# EAGLE board magarray-halleffect-Panel (EAGLE 7.7.0), part 1 of 3
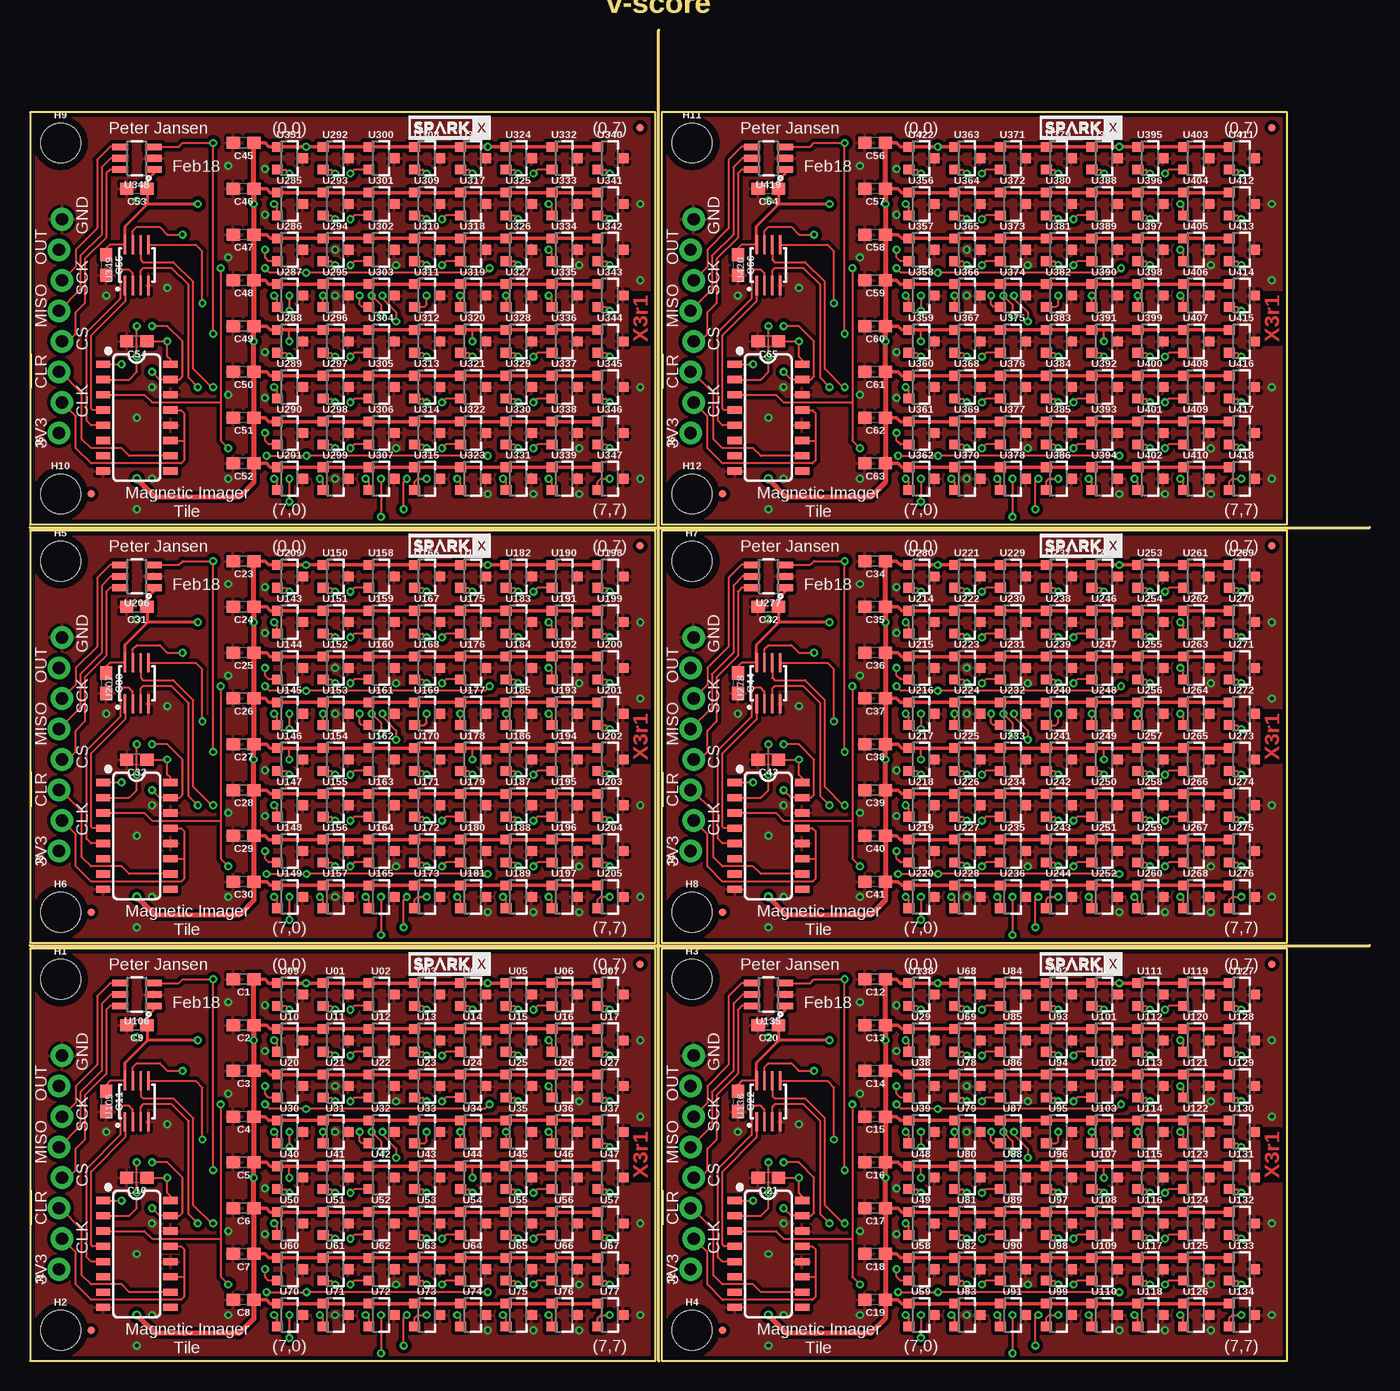
[diagram p0: board, top side]
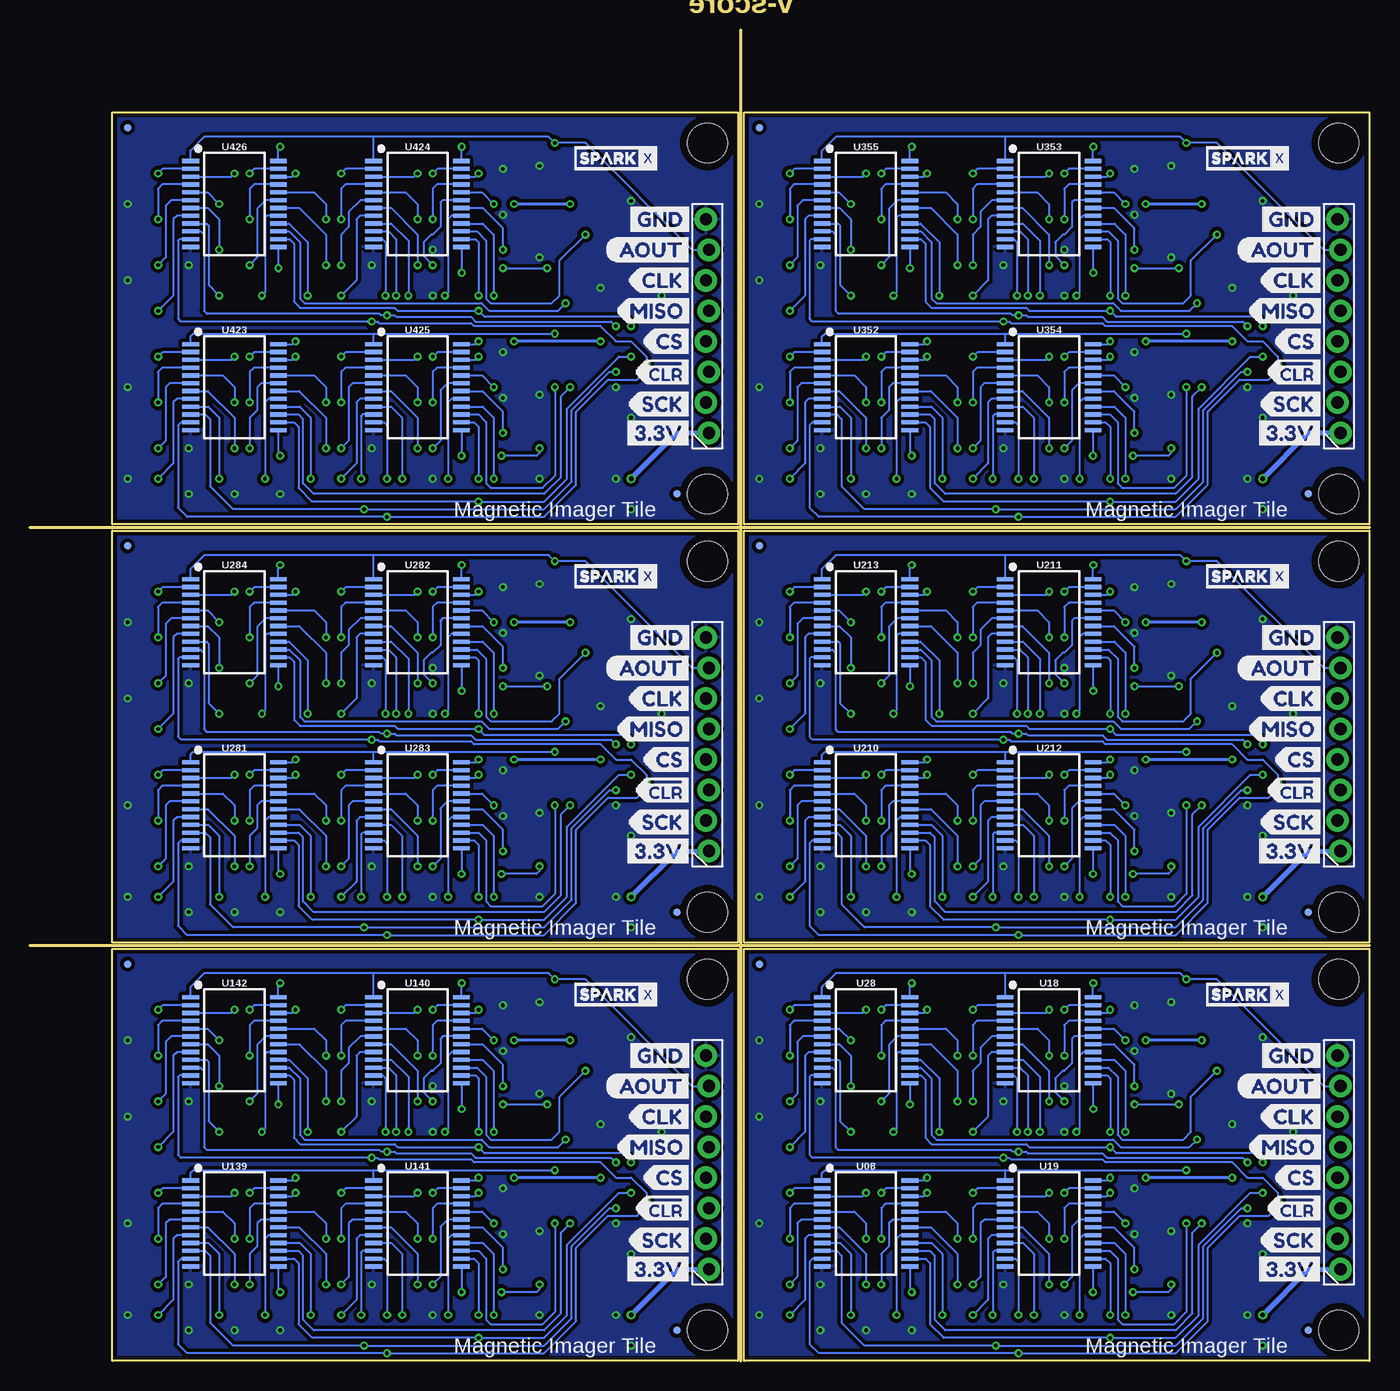
[diagram p1: board, bottom side, seen from below]

Size 111.51 x 110.74 mm. Coordinates in mm from the lower left corner, seen from the top.
Outline: 52.32,0 52.32,110.74
Outline: 0,34.54 111.51,34.54
Outline: 0,69.34 111.51,69.34
Outline: 0,0 52.07,0 52.07,34.29 0,34.29 0,0
Outline: 52.58,0 104.65,0 104.65,34.29 52.58,34.29 52.58,0
Outline: 0,34.8 52.07,34.8 52.07,69.09 0,69.09 0,34.8
Outline: 52.58,34.8 104.65,34.8 104.65,69.09 52.58,69.09 52.58,34.8
Outline: 0,69.6 52.07,69.6 52.07,103.89 0,103.89 0,69.6
Outline: 52.58,69.6 104.65,69.6 104.65,103.89 52.58,103.89 52.58,69.6
Copper layers (1*16): Top 0.035mm / dielectric 1.5mm / Bottom 0.035mm
Design rules "SparkFun-2-layer-PCBWay-LIMIT": minimum track width 6mil, minimum drill 0.3mm, track to track 6mil, track to pad 6mil, pad to pad 6mil, via to via 6mil, smd to smd 6mil, copper to edge 6mil, drill to drill 6mil, minimum pad ring 7mil, minimum via ring 7mil, stop-mask expansion 4mil, vias tented up to drill 25mil, thermal gap 10mil

## Footprints (pad centres in the part's own frame; a part is rotated, then mirrored left to right if it is on the bottom)
0603 = smd 1.1 x 1: 1 -0.85,0; 2 0.85,0
FIDUCIAL-MICRO = smd 0.635 x 0.635: 1 0,0
STAND-OFF = hole 3.302: 0,0
1X08_LOCK_NO_SILK = drill 1.016 pad 1.88: 1 0,0.127; 2 2.54,-0.127; 3 5.08,0.127; 4 7.62,-0.127; 5 10.16,0.127; 6 12.7,-0.127; 7 15.24,0.127; 8 17.78,-0.127
SOT23-3 = smd 0.8 x 0.9: 1 -0.95,-1; 2 0.95,-1; 3 0,1.1
SSOP24 = smd 0.348 x 1.397: 1 -3.575,-3.656; 2 -2.925,-3.656; 3 -2.275,-3.656; 4 -1.625,-3.656; 5 -0.975,-3.656; 6 -0.325,-3.656; 7 0.325,-3.656; 8 0.975,-3.656; 9 1.625,-3.656; 10 2.275,-3.656; 11 2.925,-3.656; 12 3.575,-3.656; 13 3.575,3.656; 14 2.925,3.656; 15 2.275,3.656; 16 1.625,3.656; 17 0.975,3.656; 18 0.325,3.656; 19 -0.325,3.656; 20 -0.975,3.656; 21 -1.625,3.656; 22 -2.275,3.656; 23 -2.925,3.656; 24 -3.575,3.656
SO16 = smd 0.6 x 1.2: 1 -4.445,-2.8; 2 -3.175,-2.8; 3 -1.905,-2.8; 4 -0.635,-2.8; 5 0.635,-2.8; 6 1.905,-2.8; 7 3.175,-2.8; 8 4.445,-2.8; 9 4.445,2.8; 10 3.175,2.8; 11 1.905,2.8; 12 0.635,2.8; 13 -0.635,2.8; 14 -1.905,2.8; 15 -3.175,2.8; 16 -4.445,2.8
SM8 = smd 1.55 x 0.25: 1 -1.7,0.975; 2 -1.7,0.325; 3 -1.7,-0.325; 4 -1.7,-0.975; 5 1.7,-0.975; 6 1.7,-0.325; 7 1.7,0.325; 8 1.7,0.975
SOT23-6 = smd 0.55 x 1.35: 1 -0.95,-1.375; 2 0,-1.375; 3 0.95,-1.375; 4 0.95,1.375; 5 0,1.375; 6 -0.95,1.375

## Placement (x,y rotation side)
C1  4.7uF  [0603]  17.78,31.75 180 top
C2  4.7uF  [0603]  17.78,27.94 180 top
C3  4.7uF  [0603]  17.78,24.13 180 top
C4  4.7uF  [0603]  17.78,20.32 180 top
C5  4.7uF  [0603]  17.78,16.51 180 top
C6  4.7uF  [0603]  17.78,12.7 180 top
C7  4.7uF  [0603]  17.78,8.89 180 top
C8  4.7uF  [0603]  17.78,5.08 180 top
C9  0.1uF  [0603]  8.89,27.94 180 top
C10  0.1uF  [0603]  8.89,15.24 180 top
C11  0.1uF  [0603]  6.35,21.59 270 top
C12  4.7uF  [0603]  70.36,31.75 180 top
C13  4.7uF  [0603]  70.36,27.94 180 top
C14  4.7uF  [0603]  70.36,24.13 180 top
C15  4.7uF  [0603]  70.36,20.32 180 top
C16  4.7uF  [0603]  70.36,16.51 180 top
C17  4.7uF  [0603]  70.36,12.7 180 top
C18  4.7uF  [0603]  70.36,8.89 180 top
C19  4.7uF  [0603]  70.36,5.08 180 top
C20  0.1uF  [0603]  61.47,27.94 180 top
C21  0.1uF  [0603]  61.47,15.24 180 top
C22  0.1uF  [0603]  58.93,21.59 270 top
C23  4.7uF  [0603]  17.78,66.55 180 top
C24  4.7uF  [0603]  17.78,62.74 180 top
C25  4.7uF  [0603]  17.78,58.93 180 top
C26  4.7uF  [0603]  17.78,55.12 180 top
C27  4.7uF  [0603]  17.78,51.31 180 top
C28  4.7uF  [0603]  17.78,47.5 180 top
C29  4.7uF  [0603]  17.78,43.69 180 top
C30  4.7uF  [0603]  17.78,39.88 180 top
C31  0.1uF  [0603]  8.89,62.74 180 top
C32  0.1uF  [0603]  8.89,50.04 180 top
C33  0.1uF  [0603]  6.35,56.39 270 top
C34  4.7uF  [0603]  70.36,66.55 180 top
C35  4.7uF  [0603]  70.36,62.74 180 top
C36  4.7uF  [0603]  70.36,58.93 180 top
C37  4.7uF  [0603]  70.36,55.12 180 top
C38  4.7uF  [0603]  70.36,51.31 180 top
C39  4.7uF  [0603]  70.36,47.5 180 top
C40  4.7uF  [0603]  70.36,43.69 180 top
C41  4.7uF  [0603]  70.36,39.88 180 top
C42  0.1uF  [0603]  61.47,62.74 180 top
C43  0.1uF  [0603]  61.47,50.04 180 top
C44  0.1uF  [0603]  58.93,56.39 270 top
C45  4.7uF  [0603]  17.78,101.35 180 top
C46  4.7uF  [0603]  17.78,97.54 180 top
C47  4.7uF  [0603]  17.78,93.73 180 top
C48  4.7uF  [0603]  17.78,89.92 180 top
C49  4.7uF  [0603]  17.78,86.11 180 top
C50  4.7uF  [0603]  17.78,82.3 180 top
C51  4.7uF  [0603]  17.78,78.49 180 top
C52  4.7uF  [0603]  17.78,74.68 180 top
C53  0.1uF  [0603]  8.89,97.54 180 top
C54  0.1uF  [0603]  8.89,84.84 180 top
C55  0.1uF  [0603]  6.35,91.19 270 top
C56  4.7uF  [0603]  70.36,101.35 180 top
C57  4.7uF  [0603]  70.36,97.54 180 top
C58  4.7uF  [0603]  70.36,93.73 180 top
C59  4.7uF  [0603]  70.36,89.92 180 top
C60  4.7uF  [0603]  70.36,86.11 180 top
C61  4.7uF  [0603]  70.36,82.3 180 top
C62  4.7uF  [0603]  70.36,78.49 180 top
C63  4.7uF  [0603]  70.36,74.68 180 top
C64  0.1uF  [0603]  61.47,97.54 180 top
C65  0.1uF  [0603]  61.47,84.84 180 top
C66  0.1uF  [0603]  58.93,91.19 270 top
FD1  FIDUCIALUFIDUCIAL  [FIDUCIAL-MICRO]  50.8,33.02 90 top
FD2  FIDUCIALUFIDUCIAL  [FIDUCIAL-MICRO]  5.08,2.54 90 top
FD3  FIDUCIALUFIDUCIAL  [FIDUCIAL-MICRO]  5.08,2.54 90 bottom
FD4  FIDUCIALUFIDUCIAL  [FIDUCIAL-MICRO]  50.8,33.02 90 bottom
FD5  FIDUCIALUFIDUCIAL  [FIDUCIAL-MICRO]  103.38,33.02 90 top
FD6  FIDUCIALUFIDUCIAL  [FIDUCIAL-MICRO]  57.66,2.54 90 top
FD7  FIDUCIALUFIDUCIAL  [FIDUCIAL-MICRO]  57.66,2.54 90 bottom
FD8  FIDUCIALUFIDUCIAL  [FIDUCIAL-MICRO]  103.38,33.02 90 bottom
FD9  FIDUCIALUFIDUCIAL  [FIDUCIAL-MICRO]  50.8,67.82 90 top
FD10  FIDUCIALUFIDUCIAL  [FIDUCIAL-MICRO]  5.08,37.34 90 top
FD11  FIDUCIALUFIDUCIAL  [FIDUCIAL-MICRO]  5.08,37.34 90 bottom
FD12  FIDUCIALUFIDUCIAL  [FIDUCIAL-MICRO]  50.8,67.82 90 bottom
FD13  FIDUCIALUFIDUCIAL  [FIDUCIAL-MICRO]  103.38,67.82 90 top
FD14  FIDUCIALUFIDUCIAL  [FIDUCIAL-MICRO]  57.66,37.34 90 top
FD15  FIDUCIALUFIDUCIAL  [FIDUCIAL-MICRO]  57.66,37.34 90 bottom
FD16  FIDUCIALUFIDUCIAL  [FIDUCIAL-MICRO]  103.38,67.82 90 bottom
FD17  FIDUCIALUFIDUCIAL  [FIDUCIAL-MICRO]  50.8,102.62 90 top
FD18  FIDUCIALUFIDUCIAL  [FIDUCIAL-MICRO]  5.08,72.14 90 top
FD19  FIDUCIALUFIDUCIAL  [FIDUCIAL-MICRO]  5.08,72.14 90 bottom
FD20  FIDUCIALUFIDUCIAL  [FIDUCIAL-MICRO]  50.8,102.62 90 bottom
FD21  FIDUCIALUFIDUCIAL  [FIDUCIAL-MICRO]  103.38,102.62 90 top
FD22  FIDUCIALUFIDUCIAL  [FIDUCIAL-MICRO]  57.66,72.14 90 top
FD23  FIDUCIALUFIDUCIAL  [FIDUCIAL-MICRO]  57.66,72.14 90 bottom
FD24  FIDUCIALUFIDUCIAL  [FIDUCIAL-MICRO]  103.38,102.62 90 bottom
H1  STAND-OFF  [STAND-OFF]  2.54,31.75 0 top
H2  STAND-OFF  [STAND-OFF]  2.54,2.54 0 top
H3  STAND-OFF  [STAND-OFF]  55.12,31.75 0 top
H4  STAND-OFF  [STAND-OFF]  55.12,2.54 0 top
H5  STAND-OFF  [STAND-OFF]  2.54,66.55 0 top
H6  STAND-OFF  [STAND-OFF]  2.54,37.34 0 top
H7  STAND-OFF  [STAND-OFF]  55.12,66.55 0 top
H8  STAND-OFF  [STAND-OFF]  55.12,37.34 0 top
H9  STAND-OFF  [STAND-OFF]  2.54,101.35 0 top
H10  STAND-OFF  [STAND-OFF]  2.54,72.14 0 top
H11  STAND-OFF  [STAND-OFF]  55.12,101.35 0 top
H12  STAND-OFF  [STAND-OFF]  55.12,72.14 0 top
J1  [1X08_LOCK_NO_SILK]  2.54,7.62 90 top
J2  [1X08_LOCK_NO_SILK]  55.12,7.62 90 top
J3  [1X08_LOCK_NO_SILK]  2.54,42.42 90 top
J4  [1X08_LOCK_NO_SILK]  55.12,42.42 90 top
J5  [1X08_LOCK_NO_SILK]  2.54,77.22 90 top
J6  [1X08_LOCK_NO_SILK]  55.12,77.22 90 top
U01  DRV5053  [SOT23-3]  25.4,30.48 270 top
U02  DRV5053  [SOT23-3]  29.21,30.48 270 top
U03  DRV5053  [SOT23-3]  33.02,30.48 270 top
U04  DRV5053  [SOT23-3]  36.83,30.48 270 top
U05  DRV5053  [SOT23-3]  40.64,30.48 270 top
U06  DRV5053  [SOT23-3]  44.45,30.48 270 top
U07  DRV5053  [SOT23-3]  48.26,30.48 270 top
U08  CD74HC4067  [SSOP24]  41.91,11.43 270 bottom
U09  DRV5053  [SOT23-3]  21.59,30.48 270 top
U10  DRV5053  [SOT23-3]  21.59,26.67 270 top
U11  DRV5053  [SOT23-3]  25.4,26.67 270 top
U12  DRV5053  [SOT23-3]  29.21,26.67 270 top
U13  DRV5053  [SOT23-3]  33.02,26.67 270 top
U14  DRV5053  [SOT23-3]  36.83,26.67 270 top
U15  DRV5053  [SOT23-3]  40.64,26.67 270 top
U16  DRV5053  [SOT23-3]  44.45,26.67 270 top
U17  DRV5053  [SOT23-3]  48.26,26.67 270 top
U18  CD74HC4067  [SSOP24]  26.67,26.67 270 bottom
U19  CD74HC4067  [SSOP24]  26.67,11.43 270 bottom
U20  DRV5053  [SOT23-3]  21.59,22.86 270 top
U21  DRV5053  [SOT23-3]  25.4,22.86 270 top
U22  DRV5053  [SOT23-3]  29.21,22.86 270 top
U23  DRV5053  [SOT23-3]  33.02,22.86 270 top
U24  DRV5053  [SOT23-3]  36.83,22.86 270 top
U25  DRV5053  [SOT23-3]  40.64,22.86 270 top
U26  DRV5053  [SOT23-3]  44.45,22.86 270 top
U27  DRV5053  [SOT23-3]  48.26,22.86 270 top
U28  CD74HC4067  [SSOP24]  41.91,26.67 270 bottom
U29  DRV5053  [SOT23-3]  74.17,26.67 270 top
U30  DRV5053  [SOT23-3]  21.59,19.05 270 top
U31  DRV5053  [SOT23-3]  25.4,19.05 270 top
U32  DRV5053  [SOT23-3]  29.21,19.05 270 top
U33  DRV5053  [SOT23-3]  33.02,19.05 270 top
U34  DRV5053  [SOT23-3]  36.83,19.05 270 top
U35  DRV5053  [SOT23-3]  40.64,19.05 270 top
U36  DRV5053  [SOT23-3]  44.45,19.05 270 top
U37  DRV5053  [SOT23-3]  48.26,19.05 270 top
U38  DRV5053  [SOT23-3]  74.17,22.86 270 top
U39  DRV5053  [SOT23-3]  74.17,19.05 270 top
U40  DRV5053  [SOT23-3]  21.59,15.24 270 top
U41  DRV5053  [SOT23-3]  25.4,15.24 270 top
U42  DRV5053  [SOT23-3]  29.21,15.24 270 top
U43  DRV5053  [SOT23-3]  33.02,15.24 270 top
U44  DRV5053  [SOT23-3]  36.83,15.24 270 top
U45  DRV5053  [SOT23-3]  40.64,15.24 270 top
U46  DRV5053  [SOT23-3]  44.45,15.24 270 top
U47  DRV5053  [SOT23-3]  48.26,15.24 270 top
U48  DRV5053  [SOT23-3]  74.17,15.24 270 top
U49  DRV5053  [SOT23-3]  74.17,11.43 270 top
U50  DRV5053  [SOT23-3]  21.59,11.43 270 top
U51  DRV5053  [SOT23-3]  25.4,11.43 270 top
U52  DRV5053  [SOT23-3]  29.21,11.43 270 top
U53  DRV5053  [SOT23-3]  33.02,11.43 270 top
U54  DRV5053  [SOT23-3]  36.83,11.43 270 top
U55  DRV5053  [SOT23-3]  40.64,11.43 270 top
U56  DRV5053  [SOT23-3]  44.45,11.43 270 top
U57  DRV5053  [SOT23-3]  48.26,11.43 270 top
U58  DRV5053  [SOT23-3]  74.17,7.62 270 top
U59  DRV5053  [SOT23-3]  74.17,3.81 270 top
U60  DRV5053  [SOT23-3]  21.59,7.62 270 top
U61  DRV5053  [SOT23-3]  25.4,7.62 270 top
U62  DRV5053  [SOT23-3]  29.21,7.62 270 top
U63  DRV5053  [SOT23-3]  33.02,7.62 270 top
U64  DRV5053  [SOT23-3]  36.83,7.62 270 top
U65  DRV5053  [SOT23-3]  40.64,7.62 270 top
U66  DRV5053  [SOT23-3]  44.45,7.62 270 top
U67  DRV5053  [SOT23-3]  48.26,7.62 270 top
U68  DRV5053  [SOT23-3]  77.98,30.48 270 top
U69  DRV5053  [SOT23-3]  77.98,26.67 270 top
U70  DRV5053  [SOT23-3]  21.59,3.81 270 top
U71  DRV5053  [SOT23-3]  25.4,3.81 270 top
U72  DRV5053  [SOT23-3]  29.21,3.81 270 top
U73  DRV5053  [SOT23-3]  33.02,3.81 270 top
U74  DRV5053  [SOT23-3]  36.83,3.81 270 top
U75  DRV5053  [SOT23-3]  40.64,3.81 270 top
U76  DRV5053  [SOT23-3]  44.45,3.81 270 top
U77  DRV5053  [SOT23-3]  48.26,3.81 270 top
U78  DRV5053  [SOT23-3]  77.98,22.86 270 top
U79  DRV5053  [SOT23-3]  77.98,19.05 270 top
U80  DRV5053  [SOT23-3]  77.98,15.24 270 top
U81  DRV5053  [SOT23-3]  77.98,11.43 270 top
U82  DRV5053  [SOT23-3]  77.98,7.62 270 top
U83  DRV5053  [SOT23-3]  77.98,3.81 270 top
U84  DRV5053  [SOT23-3]  81.79,30.48 270 top
U85  DRV5053  [SOT23-3]  81.79,26.67 270 top
U86  DRV5053  [SOT23-3]  81.79,22.86 270 top
U87  DRV5053  [SOT23-3]  81.79,19.05 270 top
U88  DRV5053  [SOT23-3]  81.79,15.24 270 top
U89  DRV5053  [SOT23-3]  81.79,11.43 270 top
U90  DRV5053  [SOT23-3]  81.79,7.62 270 top
U91  DRV5053  [SOT23-3]  81.79,3.81 270 top
U92  DRV5053  [SOT23-3]  85.6,30.48 270 top
U93  DRV5053  [SOT23-3]  85.6,26.67 270 top
U94  DRV5053  [SOT23-3]  85.6,22.86 270 top
U95  DRV5053  [SOT23-3]  85.6,19.05 270 top
U96  DRV5053  [SOT23-3]  85.6,15.24 270 top
U97  DRV5053  [SOT23-3]  85.6,11.43 270 top
U98  DRV5053  [SOT23-3]  85.6,7.62 270 top
U99  DRV5053  [SOT23-3]  85.6,3.81 270 top
U100  DRV5053  [SOT23-3]  89.41,30.48 270 top
U101  DRV5053  [SOT23-3]  89.41,26.67 270 top
U102  DRV5053  [SOT23-3]  89.41,22.86 270 top
U103  DRV5053  [SOT23-3]  89.41,19.05 270 top
U104  SN74HC509A  [SO16]  8.89,8.89 270 top
U105  SN74LVC1G139  [SM8]  8.89,21.59 90 top
U106  AD7940  [SOT23-6]  8.89,30.48 90 top
U107  DRV5053  [SOT23-3]  89.41,15.24 270 top
U108  DRV5053  [SOT23-3]  89.41,11.43 270 top
U109  DRV5053  [SOT23-3]  89.41,7.62 270 top
U110  DRV5053  [SOT23-3]  89.41,3.81 270 top
U111  DRV5053  [SOT23-3]  93.22,30.48 270 top
U112  DRV5053  [SOT23-3]  93.22,26.67 270 top
U113  DRV5053  [SOT23-3]  93.22,22.86 270 top
U114  DRV5053  [SOT23-3]  93.22,19.05 270 top
U115  DRV5053  [SOT23-3]  93.22,15.24 270 top
U116  DRV5053  [SOT23-3]  93.22,11.43 270 top
U117  DRV5053  [SOT23-3]  93.22,7.62 270 top
U118  DRV5053  [SOT23-3]  93.22,3.81 270 top
U119  DRV5053  [SOT23-3]  97.03,30.48 270 top
U120  DRV5053  [SOT23-3]  97.03,26.67 270 top
U121  DRV5053  [SOT23-3]  97.03,22.86 270 top
U122  DRV5053  [SOT23-3]  97.03,19.05 270 top
U123  DRV5053  [SOT23-3]  97.03,15.24 270 top
U124  DRV5053  [SOT23-3]  97.03,11.43 270 top
U125  DRV5053  [SOT23-3]  97.03,7.62 270 top
U126  DRV5053  [SOT23-3]  97.03,3.81 270 top
U127  DRV5053  [SOT23-3]  100.84,30.48 270 top
U128  DRV5053  [SOT23-3]  100.84,26.67 270 top
U129  DRV5053  [SOT23-3]  100.84,22.86 270 top
U130  DRV5053  [SOT23-3]  100.84,19.05 270 top
U131  DRV5053  [SOT23-3]  100.84,15.24 270 top
U132  DRV5053  [SOT23-3]  100.84,11.43 270 top
U133  DRV5053  [SOT23-3]  100.84,7.62 270 top
U134  DRV5053  [SOT23-3]  100.84,3.81 270 top
U135  AD7940  [SOT23-6]  61.47,30.48 90 top
U136  SN74LVC1G139  [SM8]  61.47,21.59 90 top
U137  SN74HC509A  [SO16]  61.47,8.89 270 top
U138  DRV5053  [SOT23-3]  74.17,30.48 270 top
U139  CD74HC4067  [SSOP24]  94.49,11.43 270 bottom
U140  CD74HC4067  [SSOP24]  79.25,26.67 270 bottom
U141  CD74HC4067  [SSOP24]  79.25,11.43 270 bottom
U142  CD74HC4067  [SSOP24]  94.49,26.67 270 bottom
U143  DRV5053  [SOT23-3]  21.59,61.47 270 top
U144  DRV5053  [SOT23-3]  21.59,57.66 270 top
U145  DRV5053  [SOT23-3]  21.59,53.85 270 top
U146  DRV5053  [SOT23-3]  21.59,50.04 270 top
U147  DRV5053  [SOT23-3]  21.59,46.23 270 top
U148  DRV5053  [SOT23-3]  21.59,42.42 270 top
U149  DRV5053  [SOT23-3]  21.59,38.61 270 top
U150  DRV5053  [SOT23-3]  25.4,65.28 270 top
U151  DRV5053  [SOT23-3]  25.4,61.47 270 top
U152  DRV5053  [SOT23-3]  25.4,57.66 270 top
U153  DRV5053  [SOT23-3]  25.4,53.85 270 top
U154  DRV5053  [SOT23-3]  25.4,50.04 270 top
U155  DRV5053  [SOT23-3]  25.4,46.23 270 top
U156  DRV5053  [SOT23-3]  25.4,42.42 270 top
U157  DRV5053  [SOT23-3]  25.4,38.61 270 top
U158  DRV5053  [SOT23-3]  29.21,65.28 270 top
U159  DRV5053  [SOT23-3]  29.21,61.47 270 top
U160  DRV5053  [SOT23-3]  29.21,57.66 270 top
U161  DRV5053  [SOT23-3]  29.21,53.85 270 top
U162  DRV5053  [SOT23-3]  29.21,50.04 270 top
U163  DRV5053  [SOT23-3]  29.21,46.23 270 top
U164  DRV5053  [SOT23-3]  29.21,42.42 270 top
U165  DRV5053  [SOT23-3]  29.21,38.61 270 top
U166  DRV5053  [SOT23-3]  33.02,65.28 270 top
U167  DRV5053  [SOT23-3]  33.02,61.47 270 top
U168  DRV5053  [SOT23-3]  33.02,57.66 270 top
U169  DRV5053  [SOT23-3]  33.02,53.85 270 top
U170  DRV5053  [SOT23-3]  33.02,50.04 270 top
U171  DRV5053  [SOT23-3]  33.02,46.23 270 top
U172  DRV5053  [SOT23-3]  33.02,42.42 270 top
U173  DRV5053  [SOT23-3]  33.02,38.61 270 top
U174  DRV5053  [SOT23-3]  36.83,65.28 270 top
U175  DRV5053  [SOT23-3]  36.83,61.47 270 top
U176  DRV5053  [SOT23-3]  36.83,57.66 270 top
U177  DRV5053  [SOT23-3]  36.83,53.85 270 top
U178  DRV5053  [SOT23-3]  36.83,50.04 270 top
U179  DRV5053  [SOT23-3]  36.83,46.23 270 top
U180  DRV5053  [SOT23-3]  36.83,42.42 270 top
U181  DRV5053  [SOT23-3]  36.83,38.61 270 top
U182  DRV5053  [SOT23-3]  40.64,65.28 270 top
U183  DRV5053  [SOT23-3]  40.64,61.47 270 top
U184  DRV5053  [SOT23-3]  40.64,57.66 270 top
U185  DRV5053  [SOT23-3]  40.64,53.85 270 top
U186  DRV5053  [SOT23-3]  40.64,50.04 270 top
U187  DRV5053  [SOT23-3]  40.64,46.23 270 top
U188  DRV5053  [SOT23-3]  40.64,42.42 270 top
U189  DRV5053  [SOT23-3]  40.64,38.61 270 top
U190  DRV5053  [SOT23-3]  44.45,65.28 270 top
U191  DRV5053  [SOT23-3]  44.45,61.47 270 top
U192  DRV5053  [SOT23-3]  44.45,57.66 270 top
U193  DRV5053  [SOT23-3]  44.45,53.85 270 top
U194  DRV5053  [SOT23-3]  44.45,50.04 270 top
U195  DRV5053  [SOT23-3]  44.45,46.23 270 top
U196  DRV5053  [SOT23-3]  44.45,42.42 270 top
U197  DRV5053  [SOT23-3]  44.45,38.61 270 top
U198  DRV5053  [SOT23-3]  48.26,65.28 270 top
U199  DRV5053  [SOT23-3]  48.26,61.47 270 top
U200  DRV5053  [SOT23-3]  48.26,57.66 270 top
U201  DRV5053  [SOT23-3]  48.26,53.85 270 top
U202  DRV5053  [SOT23-3]  48.26,50.04 270 top
U203  DRV5053  [SOT23-3]  48.26,46.23 270 top
U204  DRV5053  [SOT23-3]  48.26,42.42 270 top
U205  DRV5053  [SOT23-3]  48.26,38.61 270 top
U206  AD7940  [SOT23-6]  8.89,65.28 90 top
U207  SN74LVC1G139  [SM8]  8.89,56.39 90 top
U208  SN74HC509A  [SO16]  8.89,43.69 270 top
U209  DRV5053  [SOT23-3]  21.59,65.28 270 top
U210  CD74HC4067  [SSOP24]  41.91,46.23 270 bottom
U211  CD74HC4067  [SSOP24]  26.67,61.47 270 bottom
U212  CD74HC4067  [SSOP24]  26.67,46.23 270 bottom
U213  CD74HC4067  [SSOP24]  41.91,61.47 270 bottom
U214  DRV5053  [SOT23-3]  74.17,61.47 270 top
U215  DRV5053  [SOT23-3]  74.17,57.66 270 top
U216  DRV5053  [SOT23-3]  74.17,53.85 270 top
U217  DRV5053  [SOT23-3]  74.17,50.04 270 top
U218  DRV5053  [SOT23-3]  74.17,46.23 270 top
U219  DRV5053  [SOT23-3]  74.17,42.42 270 top
U220  DRV5053  [SOT23-3]  74.17,38.61 270 top
U221  DRV5053  [SOT23-3]  77.98,65.28 270 top
U222  DRV5053  [SOT23-3]  77.98,61.47 270 top
U223  DRV5053  [SOT23-3]  77.98,57.66 270 top
U224  DRV5053  [SOT23-3]  77.98,53.85 270 top
U225  DRV5053  [SOT23-3]  77.98,50.04 270 top
U226  DRV5053  [SOT23-3]  77.98,46.23 270 top
U227  DRV5053  [SOT23-3]  77.98,42.42 270 top
U228  DRV5053  [SOT23-3]  77.98,38.61 270 top
U229  DRV5053  [SOT23-3]  81.79,65.28 270 top
U230  DRV5053  [SOT23-3]  81.79,61.47 270 top
U231  DRV5053  [SOT23-3]  81.79,57.66 270 top
U232  DRV5053  [SOT23-3]  81.79,53.85 270 top
U233  DRV5053  [SOT23-3]  81.79,50.04 270 top
U234  DRV5053  [SOT23-3]  81.79,46.23 270 top
U235  DRV5053  [SOT23-3]  81.79,42.42 270 top
U236  DRV5053  [SOT23-3]  81.79,38.61 270 top
U237  DRV5053  [SOT23-3]  85.6,65.28 270 top
U238  DRV5053  [SOT23-3]  85.6,61.47 270 top
U239  DRV5053  [SOT23-3]  85.6,57.66 270 top
U240  DRV5053  [SOT23-3]  85.6,53.85 270 top
U241  DRV5053  [SOT23-3]  85.6,50.04 270 top
U242  DRV5053  [SOT23-3]  85.6,46.23 270 top
U243  DRV5053  [SOT23-3]  85.6,42.42 270 top
U244  DRV5053  [SOT23-3]  85.6,38.61 270 top
U245  DRV5053  [SOT23-3]  89.41,65.28 270 top
U246  DRV5053  [SOT23-3]  89.41,61.47 270 top
U247  DRV5053  [SOT23-3]  89.41,57.66 270 top
U248  DRV5053  [SOT23-3]  89.41,53.85 270 top
U249  DRV5053  [SOT23-3]  89.41,50.04 270 top
U250  DRV5053  [SOT23-3]  89.41,46.23 270 top
U251  DRV5053  [SOT23-3]  89.41,42.42 270 top
U252  DRV5053  [SOT23-3]  89.41,38.61 270 top
U253  DRV5053  [SOT23-3]  93.22,65.28 270 top
U254  DRV5053  [SOT23-3]  93.22,61.47 270 top
U255  DRV5053  [SOT23-3]  93.22,57.66 270 top
U256  DRV5053  [SOT23-3]  93.22,53.85 270 top
U257  DRV5053  [SOT23-3]  93.22,50.04 270 top
U258  DRV5053  [SOT23-3]  93.22,46.23 270 top
U259  DRV5053  [SOT23-3]  93.22,42.42 270 top
U260  DRV5053  [SOT23-3]  93.22,38.61 270 top
U261  DRV5053  [SOT23-3]  97.03,65.28 270 top
U262  DRV5053  [SOT23-3]  97.03,61.47 270 top
U263  DRV5053  [SOT23-3]  97.03,57.66 270 top
U264  DRV5053  [SOT23-3]  97.03,53.85 270 top
U265  DRV5053  [SOT23-3]  97.03,50.04 270 top
U266  DRV5053  [SOT23-3]  97.03,46.23 270 top
U267  DRV5053  [SOT23-3]  97.03,42.42 270 top
U268  DRV5053  [SOT23-3]  97.03,38.61 270 top
U269  DRV5053  [SOT23-3]  100.84,65.28 270 top
U270  DRV5053  [SOT23-3]  100.84,61.47 270 top
U271  DRV5053  [SOT23-3]  100.84,57.66 270 top
U272  DRV5053  [SOT23-3]  100.84,53.85 270 top
U273  DRV5053  [SOT23-3]  100.84,50.04 270 top
U274  DRV5053  [SOT23-3]  100.84,46.23 270 top
U275  DRV5053  [SOT23-3]  100.84,42.42 270 top
U276  DRV5053  [SOT23-3]  100.84,38.61 270 top
U277  AD7940  [SOT23-6]  61.47,65.28 90 top
U278  SN74LVC1G139  [SM8]  61.47,56.39 90 top
U279  SN74HC509A  [SO16]  61.47,43.69 270 top
U280  DRV5053  [SOT23-3]  74.17,65.28 270 top
U281  CD74HC4067  [SSOP24]  94.49,46.23 270 bottom
U282  CD74HC4067  [SSOP24]  79.25,61.47 270 bottom
U283  CD74HC4067  [SSOP24]  79.25,46.23 270 bottom
U284  CD74HC4067  [SSOP24]  94.49,61.47 270 bottom
U285  DRV5053  [SOT23-3]  21.59,96.27 270 top
U286  DRV5053  [SOT23-3]  21.59,92.46 270 top
U287  DRV5053  [SOT23-3]  21.59,88.65 270 top
U288  DRV5053  [SOT23-3]  21.59,84.84 270 top
U289  DRV5053  [SOT23-3]  21.59,81.03 270 top
U290  DRV5053  [SOT23-3]  21.59,77.22 270 top
U291  DRV5053  [SOT23-3]  21.59,73.41 270 top
U292  DRV5053  [SOT23-3]  25.4,100.08 270 top
U293  DRV5053  [SOT23-3]  25.4,96.27 270 top
U294  DRV5053  [SOT23-3]  25.4,92.46 270 top
U295  DRV5053  [SOT23-3]  25.4,88.65 270 top
U296  DRV5053  [SOT23-3]  25.4,84.84 270 top
U297  DRV5053  [SOT23-3]  25.4,81.03 270 top
U298  DRV5053  [SOT23-3]  25.4,77.22 270 top
U299  DRV5053  [SOT23-3]  25.4,73.41 270 top
U300  DRV5053  [SOT23-3]  29.21,100.08 270 top
U301  DRV5053  [SOT23-3]  29.21,96.27 270 top
U302  DRV5053  [SOT23-3]  29.21,92.46 270 top
U303  DRV5053  [SOT23-3]  29.21,88.65 270 top
U304  DRV5053  [SOT23-3]  29.21,84.84 270 top
U305  DRV5053  [SOT23-3]  29.21,81.03 270 top
U306  DRV5053  [SOT23-3]  29.21,77.22 270 top
U307  DRV5053  [SOT23-3]  29.21,73.41 270 top
U308  DRV5053  [SOT23-3]  33.02,100.08 270 top
U309  DRV5053  [SOT23-3]  33.02,96.27 270 top
U310  DRV5053  [SOT23-3]  33.02,92.46 270 top
U311  DRV5053  [SOT23-3]  33.02,88.65 270 top
U312  DRV5053  [SOT23-3]  33.02,84.84 270 top
U313  DRV5053  [SOT23-3]  33.02,81.03 270 top
U314  DRV5053  [SOT23-3]  33.02,77.22 270 top
U315  DRV5053  [SOT23-3]  33.02,73.41 270 top
U316  DRV5053  [SOT23-3]  36.83,100.08 270 top
U317  DRV5053  [SOT23-3]  36.83,96.27 270 top
U318  DRV5053  [SOT23-3]  36.83,92.46 270 top
U319  DRV5053  [SOT23-3]  36.83,88.65 270 top
U320  DRV5053  [SOT23-3]  36.83,84.84 270 top
U321  DRV5053  [SOT23-3]  36.83,81.03 270 top
U322  DRV5053  [SOT23-3]  36.83,77.22 270 top
U323  DRV5053  [SOT23-3]  36.83,73.41 270 top
U324  DRV5053  [SOT23-3]  40.64,100.08 270 top
U325  DRV5053  [SOT23-3]  40.64,96.27 270 top
U326  DRV5053  [SOT23-3]  40.64,92.46 270 top
U327  DRV5053  [SOT23-3]  40.64,88.65 270 top
U328  DRV5053  [SOT23-3]  40.64,84.84 270 top
U329  DRV5053  [SOT23-3]  40.64,81.03 270 top
U330  DRV5053  [SOT23-3]  40.64,77.22 270 top
U331  DRV5053  [SOT23-3]  40.64,73.41 270 top
U332  DRV5053  [SOT23-3]  44.45,100.08 270 top
U333  DRV5053  [SOT23-3]  44.45,96.27 270 top
U334  DRV5053  [SOT23-3]  44.45,92.46 270 top
U335  DRV5053  [SOT23-3]  44.45,88.65 270 top
U336  DRV5053  [SOT23-3]  44.45,84.84 270 top
U337  DRV5053  [SOT23-3]  44.45,81.03 270 top
U338  DRV5053  [SOT23-3]  44.45,77.22 270 top
U339  DRV5053  [SOT23-3]  44.45,73.41 270 top
U340  DRV5053  [SOT23-3]  48.26,100.08 270 top
U341  DRV5053  [SOT23-3]  48.26,96.27 270 top
U342  DRV5053  [SOT23-3]  48.26,92.46 270 top
U343  DRV5053  [SOT23-3]  48.26,88.65 270 top
U344  DRV5053  [SOT23-3]  48.26,84.84 270 top
U345  DRV5053  [SOT23-3]  48.26,81.03 270 top
U346  DRV5053  [SOT23-3]  48.26,77.22 270 top
U347  DRV5053  [SOT23-3]  48.26,73.41 270 top
U348  AD7940  [SOT23-6]  8.89,100.08 90 top
U349  SN74LVC1G139  [SM8]  8.89,91.19 90 top
U350  SN74HC509A  [SO16]  8.89,78.49 270 top
U351  DRV5053  [SOT23-3]  21.59,100.08 270 top
U352  CD74HC4067  [SSOP24]  41.91,81.03 270 bottom
U353  CD74HC4067  [SSOP24]  26.67,96.27 270 bottom
U354  CD74HC4067  [SSOP24]  26.67,81.03 270 bottom
U355  CD74HC4067  [SSOP24]  41.91,96.27 270 bottom
U356  DRV5053  [SOT23-3]  74.17,96.27 270 top
U357  DRV5053  [SOT23-3]  74.17,92.46 270 top
U358  DRV5053  [SOT23-3]  74.17,88.65 270 top
U359  DRV5053  [SOT23-3]  74.17,84.84 270 top
U360  DRV5053  [SOT23-3]  74.17,81.03 270 top
U361  DRV5053  [SOT23-3]  74.17,77.22 270 top
U362  DRV5053  [SOT23-3]  74.17,73.41 270 top
U363  DRV5053  [SOT23-3]  77.98,100.08 270 top
U364  DRV5053  [SOT23-3]  77.98,96.27 270 top
U365  DRV5053  [SOT23-3]  77.98,92.46 270 top
U366  DRV5053  [SOT23-3]  77.98,88.65 270 top
U367  DRV5053  [SOT23-3]  77.98,84.84 270 top
U368  DRV5053  [SOT23-3]  77.98,81.03 270 top
U369  DRV5053  [SOT23-3]  77.98,77.22 270 top
U370  DRV5053  [SOT23-3]  77.98,73.41 270 top
U371  DRV5053  [SOT23-3]  81.79,100.08 270 top
U372  DRV5053  [SOT23-3]  81.79,96.27 270 top
U373  DRV5053  [SOT23-3]  81.79,92.46 270 top
U374  DRV5053  [SOT23-3]  81.79,88.65 270 top
U375  DRV5053  [SOT23-3]  81.79,84.84 270 top
U376  DRV5053  [SOT23-3]  81.79,81.03 270 top
U377  DRV5053  [SOT23-3]  81.79,77.22 270 top
U378  DRV5053  [SOT23-3]  81.79,73.41 270 top
U379  DRV5053  [SOT23-3]  85.6,100.08 270 top
U380  DRV5053  [SOT23-3]  85.6,96.27 270 top
U381  DRV5053  [SOT23-3]  85.6,92.46 270 top
U382  DRV5053  [SOT23-3]  85.6,88.65 270 top
U383  DRV5053  [SOT23-3]  85.6,84.84 270 top
U384  DRV5053  [SOT23-3]  85.6,81.03 270 top
U385  DRV5053  [SOT23-3]  85.6,77.22 270 top
U386  DRV5053  [SOT23-3]  85.6,73.41 270 top
U387  DRV5053  [SOT23-3]  89.41,100.08 270 top
U388  DRV5053  [SOT23-3]  89.41,96.27 270 top
U389  DRV5053  [SOT23-3]  89.41,92.46 270 top
U390  DRV5053  [SOT23-3]  89.41,88.65 270 top
U391  DRV5053  [SOT23-3]  89.41,84.84 270 top
U392  DRV5053  [SOT23-3]  89.41,81.03 270 top
U393  DRV5053  [SOT23-3]  89.41,77.22 270 top
U394  DRV5053  [SOT23-3]  89.41,73.41 270 top
U395  DRV5053  [SOT23-3]  93.22,100.08 270 top
U396  DRV5053  [SOT23-3]  93.22,96.27 270 top
U397  DRV5053  [SOT23-3]  93.22,92.46 270 top
U398  DRV5053  [SOT23-3]  93.22,88.65 270 top
U399  DRV5053  [SOT23-3]  93.22,84.84 270 top
U400  DRV5053  [SOT23-3]  93.22,81.03 270 top
U401  DRV5053  [SOT23-3]  93.22,77.22 270 top
U402  DRV5053  [SOT23-3]  93.22,73.41 270 top
U403  DRV5053  [SOT23-3]  97.03,100.08 270 top
U404  DRV5053  [SOT23-3]  97.03,96.27 270 top
U405  DRV5053  [SOT23-3]  97.03,92.46 270 top
U406  DRV5053  [SOT23-3]  97.03,88.65 270 top
U407  DRV5053  [SOT23-3]  97.03,84.84 270 top
U408  DRV5053  [SOT23-3]  97.03,81.03 270 top
U409  DRV5053  [SOT23-3]  97.03,77.22 270 top
U410  DRV5053  [SOT23-3]  97.03,73.41 270 top
U411  DRV5053  [SOT23-3]  100.84,100.08 270 top
U412  DRV5053  [SOT23-3]  100.84,96.27 270 top
U413  DRV5053  [SOT23-3]  100.84,92.46 270 top
U414  DRV5053  [SOT23-3]  100.84,88.65 270 top
U415  DRV5053  [SOT23-3]  100.84,84.84 270 top
U416  DRV5053  [SOT23-3]  100.84,81.03 270 top
U417  DRV5053  [SOT23-3]  100.84,77.22 270 top
U418  DRV5053  [SOT23-3]  100.84,73.41 270 top
U419  AD7940  [SOT23-6]  61.47,100.08 90 top
U420  SN74LVC1G139  [SM8]  61.47,91.19 90 top
U421  SN74HC509A  [SO16]  61.47,78.49 270 top
U422  DRV5053  [SOT23-3]  74.17,100.08 270 top
U423  CD74HC4067  [SSOP24]  94.49,81.03 270 bottom
U424  CD74HC4067  [SSOP24]  79.25,96.27 270 bottom
U425  CD74HC4067  [SSOP24]  79.25,81.03 270 bottom
U426  CD74HC4067  [SSOP24]  94.49,96.27 270 bottom
U$1  SPARKX-LOGO3  [SPARKX-SMALL]  34.92,33.02 0 top
U$2  SPARKX-LOGO3  [SPARKX-SMALL]  10.16,30.48 0 bottom
U$3  [GND]  9.53,25.4 0 bottom
U$4  [#CLR]  8.76,12.7 0 bottom
U$5  [3#3V]  9.78,7.62 0 bottom
U$6  [AOUT]  11.05,22.86 0 bottom
U$7  [CLK]  9.14,20.32 0 bottom
U$8  [MISO]  10.16,17.78 0 bottom
U$9  [SCK]  9.14,10.03 0 bottom
U$10  [CS]  8,15.24 0 bottom
U$11  SPARKX-LOGO3  [SPARKX-SMALL]  87.5,33.02 0 top
U$12  SPARKX-LOGO3  [SPARKX-SMALL]  62.74,30.48 0 bottom
U$13  [GND]  62.1,25.4 0 bottom
U$14  [3#3V]  62.36,7.62 0 bottom
U$15  [AOUT]  63.63,22.86 0 bottom
U$16  [CLK]  61.72,20.32 0 bottom
U$17  [MISO]  62.74,17.78 0 bottom
U$18  [SCK]  61.72,10.03 0 bottom
U$19  [#CLR]  61.34,12.7 0 bottom
U$20  [CS]  60.58,15.24 0 bottom
U$21  SPARKX-LOGO3  [SPARKX-SMALL]  34.92,67.82 0 top
U$22  SPARKX-LOGO3  [SPARKX-SMALL]  10.16,65.28 0 bottom
U$23  [GND]  9.53,60.2 0 bottom
U$24  [3#3V]  9.78,42.42 0 bottom
U$25  [AOUT]  11.05,57.66 0 bottom
U$26  [CLK]  9.14,55.12 0 bottom
U$27  [MISO]  10.16,52.58 0 bottom
U$28  [SCK]  9.14,44.83 0 bottom
U$29  [#CLR]  8.76,47.5 0 bottom
U$30  [CS]  8,50.04 0 bottom
U$31  SPARKX-LOGO3  [SPARKX-SMALL]  87.5,67.82 0 top
U$32  SPARKX-LOGO3  [SPARKX-SMALL]  62.74,65.28 0 bottom
U$33  [GND]  62.1,60.2 0 bottom
U$34  [3#3V]  62.36,42.42 0 bottom
U$35  [AOUT]  63.63,57.66 0 bottom
U$36  [CLK]  61.72,55.12 0 bottom
U$37  [MISO]  62.74,52.58 0 bottom
U$38  [SCK]  61.72,44.83 0 bottom
U$39  [#CLR]  61.34,47.5 0 bottom
U$40  [CS]  60.58,50.04 0 bottom
U$41  SPARKX-LOGO3  [SPARKX-SMALL]  34.92,102.62 0 top
U$42  SPARKX-LOGO3  [SPARKX-SMALL]  10.16,100.08 0 bottom
U$43  [GND]  9.53,95 0 bottom
U$44  [3#3V]  9.78,77.22 0 bottom
U$45  [AOUT]  11.05,92.46 0 bottom
U$46  [CLK]  9.14,89.92 0 bottom
U$47  [MISO]  10.16,87.38 0 bottom
U$48  [SCK]  9.14,79.63 0 bottom
U$49  [#CLR]  8.76,82.3 0 bottom
U$50  [CS]  8,84.84 0 bottom
U$51  SPARKX-LOGO3  [SPARKX-SMALL]  87.5,102.62 0 top
U$52  SPARKX-LOGO3  [SPARKX-SMALL]  62.74,100.08 0 bottom
U$53  [GND]  62.1,95 0 bottom
U$54  [3#3V]  62.36,77.22 0 bottom
U$55  [AOUT]  63.63,92.46 0 bottom
U$56  [CLK]  61.72,89.92 0 bottom
U$57  [MISO]  62.74,87.38 0 bottom
U$58  [SCK]  61.72,79.63 0 bottom
U$59  [#CLR]  61.34,82.3 0 bottom
U$60  [CS]  60.58,84.84 0 bottom

## Library data of the parts
C1-C8 C12-C19 C23-C30 C34-C41 C45-C52 C56-C63 = SparkFun-Capacitors; PROD_ID: CAP-08280
C9-C11 C20-C22 C31-C33 C42-C44 C53-C55 C64-C66 = SparkFun-Capacitors; PROD_ID: CAP-00810
FD1-FD24 = SparkFun-Aesthetics
H1-H12 = SparkFun-Hardware
J1-J6 = SparkFun-Connectors
U01-U07 U09 U10-U17 U20-U27 U29-U138 U143-U209 U214-U280 U285-U351 U356-U422 = magneticimagertile
U08 U18 U19 U28 U139-U142 U210-U213 U281-U284 U352-U355 U423-U426 = SparkFun-IC-Logic; PROD_ID: IC-08252
U$1 U$2 U$11 U$12 U$21 U$22 U$31 U$32 U$41 U$42 U$51 U$52 = SparkX
U$3 U$5-U$9 U$13-U$18 U$23-U$28 U$33-U$38 U$43-U$48 U$53-U$58 = buzzard_labels (5)
U$4 U$10 U$19 U$20 U$29 U$30 U$39 U$40 U$49 U$50 U$59 U$60 = buzzard_labels (7)

## Nets
1I0: U18.9 U32.2
1I1: U18.8 U33.2
1I2: U18.7 U22.2
1I3: U18.6 U23.2
1I4: U12.2 U18.5
1I5: U13.2 U18.4
1I6: U02.2 U18.3
1I7: U03.2 U18.2
1I8: U01.2 U18.23
1I9: U09.2 U18.22
1I10: U11.2 U18.21
1I11: U10.2 U18.20
1I12: U18.19 U21.2
1I13: U18.18 U20.2
1I14: U18.17 U31.2
1I15: U18.16 U30.2
1I16: U87.2 U140.9
1I17: U95.2 U140.8
1I18: U86.2 U140.7
1I19: U94.2 U140.6
1I20: U85.2 U140.5
1I21: U93.2 U140.4
1I22: U84.2 U140.3
1I23: U92.2 U140.2
1I24: U68.2 U140.23
1I25: U138.2 U140.22
1I26: U69.2 U140.21
1I27: U29.2 U140.20
1I28: U78.2 U140.19
1I29: U38.2 U140.18
1I30: U79.2 U140.17
1I31: U39.2 U140.16
1I32: U161.2 U211.9
1I33: U169.2 U211.8
1I34: U160.2 U211.7
1I35: U168.2 U211.6
1I36: U159.2 U211.5
1I37: U167.2 U211.4
1I38: U158.2 U211.3
1I39: U166.2 U211.2
1I40: U150.2 U211.23
1I41: U209.2 U211.22
1I42: U151.2 U211.21
1I43: U143.2 U211.20
1I44: U152.2 U211.19
1I45: U144.2 U211.18
1I46: U153.2 U211.17
1I47: U145.2 U211.16
1I48: U232.2 U282.9
1I49: U240.2 U282.8
1I50: U231.2 U282.7
1I51: U239.2 U282.6
1I52: U230.2 U282.5
1I53: U238.2 U282.4
1I54: U229.2 U282.3
1I55: U237.2 U282.2
1I56: U221.2 U282.23
1I57: U280.2 U282.22
1I58: U222.2 U282.21
1I59: U214.2 U282.20
1I60: U223.2 U282.19
1I61: U215.2 U282.18
1I62: U224.2 U282.17
1I63: U216.2 U282.16
1I64: U303.2 U353.9
1I65: U311.2 U353.8
1I66: U302.2 U353.7
1I67: U310.2 U353.6
1I68: U301.2 U353.5
1I69: U309.2 U353.4
1I70: U300.2 U353.3
1I71: U308.2 U353.2
1I72: U292.2 U353.23
1I73: U351.2 U353.22
1I74: U293.2 U353.21
1I75: U285.2 U353.20
1I76: U294.2 U353.19
1I77: U286.2 U353.18
1I78: U295.2 U353.17
1I79: U287.2 U353.16
1I80: U374.2 U424.9
1I81: U382.2 U424.8
1I82: U373.2 U424.7
1I83: U381.2 U424.6
1I84: U372.2 U424.5
1I85: U380.2 U424.4
1I86: U371.2 U424.3
1I87: U379.2 U424.2
1I88: U363.2 U424.23
1I89: U422.2 U424.22
1I90: U364.2 U424.21
1I91: U356.2 U424.20
1I92: U365.2 U424.19
1I93: U357.2 U424.18
1I94: U366.2 U424.17
1I95: U358.2 U424.16
2I0: U19.9 U72.2
2I1: U19.8 U73.2
2I2: U19.7 U62.2
2I3: U19.6 U63.2
2I4: U19.5 U52.2
2I5: U19.4 U53.2
2I6: U19.3 U42.2
2I7: U19.2 U43.2
2I8: U19.23 U41.2
2I9: U19.22 U40.2
2I10: U19.21 U51.2
2I11: U19.20 U50.2
2I12: U19.19 U61.2
2I13: U19.18 U60.2
2I14: U19.17 U71.2
2I15: U19.16 U70.2
2I16: U91.2 U141.9
2I17: U99.2 U141.8
2I18: U90.2 U141.7
2I19: U98.2 U141.6
2I20: U89.2 U141.5
2I21: U97.2 U141.4
2I22: U88.2 U141.3
2I23: U96.2 U141.2
2I24: U80.2 U141.23
2I25: U48.2 U141.22
2I26: U81.2 U141.21
2I27: U49.2 U141.20
2I28: U82.2 U141.19
2I29: U58.2 U141.18
2I30: U83.2 U141.17
2I31: U59.2 U141.16
2I32: U165.2 U212.9
2I33: U173.2 U212.8
2I34: U164.2 U212.7
2I35: U172.2 U212.6
2I36: U163.2 U212.5
2I37: U171.2 U212.4
2I38: U162.2 U212.3
2I39: U170.2 U212.2
2I40: U154.2 U212.23
2I41: U146.2 U212.22
2I42: U155.2 U212.21
2I43: U147.2 U212.20
2I44: U156.2 U212.19
2I45: U148.2 U212.18
2I46: U157.2 U212.17
2I47: U149.2 U212.16
2I48: U236.2 U283.9
2I49: U244.2 U283.8
2I50: U235.2 U283.7
2I51: U243.2 U283.6
2I52: U234.2 U283.5
2I53: U242.2 U283.4
2I54: U233.2 U283.3
2I55: U241.2 U283.2
2I56: U225.2 U283.23
2I57: U217.2 U283.22
2I58: U226.2 U283.21
2I59: U218.2 U283.20
2I60: U227.2 U283.19
2I61: U219.2 U283.18
2I62: U228.2 U283.17
2I63: U220.2 U283.16
2I64: U307.2 U354.9
2I65: U315.2 U354.8
2I66: U306.2 U354.7
2I67: U314.2 U354.6
2I68: U305.2 U354.5
2I69: U313.2 U354.4
2I70: U304.2 U354.3
2I71: U312.2 U354.2
2I72: U296.2 U354.23
2I73: U288.2 U354.22
2I74: U297.2 U354.21
2I75: U289.2 U354.20
2I76: U298.2 U354.19
2I77: U290.2 U354.18
2I78: U299.2 U354.17
2I79: U291.2 U354.16
2I80: U378.2 U425.9
2I81: U386.2 U425.8
2I82: U377.2 U425.7
2I83: U385.2 U425.6
2I84: U376.2 U425.5
2I85: U384.2 U425.4
2I86: U375.2 U425.3
2I87: U383.2 U425.2
2I88: U367.2 U425.23
2I89: U359.2 U425.22
2I90: U368.2 U425.21
2I91: U360.2 U425.20
2I92: U369.2 U425.19
2I93: U361.2 U425.18
2I94: U370.2 U425.17
2I95: U362.2 U425.16
3.3V: C1.1 C2.1 C3.1 C4.1 C5.1 C6.1 C7.1 C8.1 C9.1 C10.1 C11.1 J1.1 U01.1 U02.1 U03.1 U04.1 U05.1 U06.1 U07.1 U08.24 U09.1 U10.1 U11.1 U12.1 U13.1 U14.1 U15.1 U16.1 U17.1 U18.24 U19.24 U20.1 U21.1 U22.1 U23.1 U24.1 U25.1 U26.1 U27.1 U28.24 U30.1 U31.1 U32.1 U33.1 U34.1 U35.1 U36.1 U37.1 U40.1 U41.1 U42.1 U43.1 U44.1 U45.1 U46.1 U47.1 U50.1 U51.1 U52.1 U53.1 U54.1 U55.1 U56.1 U57.1 U60.1 U61.1 U62.1 U63.1 U64.1 U65.1 U66.1 U67.1 U70.1 U71.1 U72.1 U73.1 U74.1 U75.1 U76.1 U77.1 U104.16 U105.8 U106.1
3.3V1: C12.1 C13.1 C14.1 C15.1 C16.1 C17.1 C18.1 C19.1 C20.1 C21.1 C22.1 J2.1 U29.1 U38.1 U39.1 U48.1 U49.1 U58.1 U59.1 U68.1 U69.1 U78.1 U79.1 U80.1 U81.1 U82.1 U83.1 U84.1 U85.1 U86.1 U87.1 U88.1 U89.1 U90.1 U91.1 U92.1 U93.1 U94.1 U95.1 U96.1 U97.1 U98.1 U99.1 U100.1 U101.1 U102.1 U103.1 U107.1 U108.1 U109.1 U110.1 U111.1 U112.1 U113.1 U114.1 U115.1 U116.1 U117.1 U118.1 U119.1 U120.1 U121.1 U122.1 U123.1 U124.1 U125.1 U126.1 U127.1 U128.1 U129.1 U130.1 U131.1 U132.1 U133.1 U134.1 U135.1 U136.8 U137.16 U138.1 U139.24 U140.24 U141.24 U142.24
3.3V2: C23.1 C24.1 C25.1 C26.1 C27.1 C28.1 C29.1 C30.1 C31.1 C32.1 C33.1 J3.1 U143.1 U144.1 U145.1 U146.1 U147.1 U148.1 U149.1 U150.1 U151.1 U152.1 U153.1 U154.1 U155.1 U156.1 U157.1 U158.1 U159.1 U160.1 U161.1 U162.1 U163.1 U164.1 U165.1 U166.1 U167.1 U168.1 U169.1 U170.1 U171.1 U172.1 U173.1 U174.1 U175.1 U176.1 U177.1 U178.1 U179.1 U180.1 U181.1 U182.1 U183.1 U184.1 U185.1 U186.1 U187.1 U188.1 U189.1 U190.1 U191.1 U192.1 U193.1 U194.1 U195.1 U196.1 U197.1 U198.1 U199.1 U200.1 U201.1 U202.1 U203.1 U204.1 U205.1 U206.1 U207.8 U208.16 U209.1 U210.24 U211.24 U212.24 U213.24
3.3V3: C34.1 C35.1 C36.1 C37.1 C38.1 C39.1 C40.1 C41.1 C42.1 C43.1 C44.1 J4.1 U214.1 U215.1 U216.1 U217.1 U218.1 U219.1 U220.1 U221.1 U222.1 U223.1 U224.1 U225.1 U226.1 U227.1 U228.1 U229.1 U230.1 U231.1 U232.1 U233.1 U234.1 U235.1 U236.1 U237.1 U238.1 U239.1 U240.1 U241.1 U242.1 U243.1 U244.1 U245.1 U246.1 U247.1 U248.1 U249.1 U250.1 U251.1 U252.1 U253.1 U254.1 U255.1 U256.1 U257.1 U258.1 U259.1 U260.1 U261.1 U262.1 U263.1 U264.1 U265.1 U266.1 U267.1 U268.1 U269.1 U270.1 U271.1 U272.1 U273.1 U274.1 U275.1 U276.1 U277.1 U278.8 U279.16 U280.1 U281.24 U282.24 U283.24 U284.24
3.3V4: C45.1 C46.1 C47.1 C48.1 C49.1 C50.1 C51.1 C52.1 C53.1 C54.1 C55.1 J5.1 U285.1 U286.1 U287.1 U288.1 U289.1 U290.1 U291.1 U292.1 U293.1 U294.1 U295.1 U296.1 U297.1 U298.1 U299.1 U300.1 U301.1 U302.1 U303.1 U304.1 U305.1 U306.1 U307.1 U308.1 U309.1 U310.1 U311.1 U312.1 U313.1 U314.1 U315.1 U316.1 U317.1 U318.1 U319.1 U320.1 U321.1 U322.1 U323.1 U324.1 U325.1 U326.1 U327.1 U328.1 U329.1 U330.1 U331.1 U332.1 U333.1 U334.1 U335.1 U336.1 U337.1 U338.1 U339.1 U340.1 U341.1 U342.1 U343.1 U344.1 U345.1 U346.1 U347.1 U348.1 U349.8 U350.16 U351.1 U352.24 U353.24 U354.24 U355.24
3.3V5: C56.1 C57.1 C58.1 C59.1 C60.1 C61.1 C62.1 C63.1 C64.1 C65.1 C66.1 J6.1 U356.1 U357.1 U358.1 U359.1 U360.1 U361.1 U362.1 U363.1 U364.1 U365.1 U366.1 U367.1 U368.1 U369.1 U370.1 U371.1 U372.1 U373.1 U374.1 U375.1 U376.1 U377.1 U378.1 U379.1 U380.1 U381.1 U382.1 U383.1 U384.1 U385.1 U386.1 U387.1 U388.1 U389.1 U390.1 U391.1 U392.1 U393.1 U394.1 U395.1 U396.1 U397.1 U398.1 U399.1 U400.1 U401.1 U402.1 U403.1 U404.1 U405.1 U406.1 U407.1 U408.1 U409.1 U410.1 U411.1 U412.1 U413.1 U414.1 U415.1 U416.1 U417.1 U418.1 U419.1 U420.8 U421.16 U422.1 U423.24 U424.24 U425.24 U426.24
3I0: U28.9 U36.2
3I1: U28.8 U37.2
3I2: U26.2 U28.7
3I3: U27.2 U28.6
3I4: U16.2 U28.5
3I5: U17.2 U28.4
3I6: U06.2 U28.3
3I7: U07.2 U28.2
3I8: U05.2 U28.23
3I9: U04.2 U28.22
3I10: U15.2 U28.21
3I11: U14.2 U28.20
3I12: U25.2 U28.19
3I13: U24.2 U28.18
3I14: U28.17 U35.2
3I15: U28.16 U34.2
3I16: U122.2 U142.9
3I17: U130.2 U142.8
3I18: U121.2 U142.7
3I19: U129.2 U142.6
3I20: U120.2 U142.5
3I21: U128.2 U142.4
3I22: U119.2 U142.3
3I23: U127.2 U142.2
3I24: U111.2 U142.23
3I25: U100.2 U142.22
3I26: U112.2 U142.21
3I27: U101.2 U142.20
3I28: U113.2 U142.19
3I29: U102.2 U142.18
3I30: U114.2 U142.17
3I31: U103.2 U142.16
3I32: U193.2 U213.9
3I33: U201.2 U213.8
3I34: U192.2 U213.7
3I35: U200.2 U213.6
3I36: U191.2 U213.5
3I37: U199.2 U213.4
3I38: U190.2 U213.3
3I39: U198.2 U213.2
3I40: U182.2 U213.23
3I41: U174.2 U213.22
3I42: U183.2 U213.21
3I43: U175.2 U213.20
3I44: U184.2 U213.19
3I45: U176.2 U213.18
3I46: U185.2 U213.17
3I47: U177.2 U213.16
3I48: U264.2 U284.9
3I49: U272.2 U284.8
3I50: U263.2 U284.7
3I51: U271.2 U284.6
3I52: U262.2 U284.5
3I53: U270.2 U284.4
3I54: U261.2 U284.3
3I55: U269.2 U284.2
3I56: U253.2 U284.23
3I57: U245.2 U284.22
3I58: U254.2 U284.21
3I59: U246.2 U284.20
3I60: U255.2 U284.19
3I61: U247.2 U284.18
3I62: U256.2 U284.17
3I63: U248.2 U284.16
3I64: U335.2 U355.9
3I65: U343.2 U355.8
3I66: U334.2 U355.7
3I67: U342.2 U355.6
3I68: U333.2 U355.5
3I69: U341.2 U355.4
3I70: U332.2 U355.3
3I71: U340.2 U355.2
3I72: U324.2 U355.23
3I73: U316.2 U355.22
3I74: U325.2 U355.21
3I75: U317.2 U355.20
3I76: U326.2 U355.19
3I77: U318.2 U355.18
3I78: U327.2 U355.17
3I79: U319.2 U355.16
3I80: U406.2 U426.9
3I81: U414.2 U426.8
3I82: U405.2 U426.7
3I83: U413.2 U426.6
3I84: U404.2 U426.5
3I85: U412.2 U426.4
3I86: U403.2 U426.3
3I87: U411.2 U426.2
3I88: U395.2 U426.23
3I89: U387.2 U426.22
3I90: U396.2 U426.21
3I91: U388.2 U426.20
3I92: U397.2 U426.19
3I93: U389.2 U426.18
3I94: U398.2 U426.17
3I95: U390.2 U426.16
4I0: U08.9 U76.2
4I1: U08.8 U77.2
4I2: U08.7 U66.2
4I3: U08.6 U67.2
4I4: U08.5 U56.2
4I5: U08.4 U57.2
4I6: U08.3 U46.2
4I7: U08.2 U47.2
4I8: U08.23 U45.2
4I9: U08.22 U44.2
4I10: U08.21 U55.2
4I11: U08.20 U54.2
4I12: U08.19 U65.2
4I13: U08.18 U64.2
4I14: U08.17 U75.2
4I15: U08.16 U74.2
4I16: U126.2 U139.9
4I17: U134.2 U139.8
4I18: U125.2 U139.7
4I19: U133.2 U139.6
4I20: U124.2 U139.5
4I21: U132.2 U139.4
4I22: U123.2 U139.3
4I23: U131.2 U139.2
4I24: U115.2 U139.23
4I25: U107.2 U139.22
4I26: U116.2 U139.21
4I27: U108.2 U139.20
4I28: U117.2 U139.19
4I29: U109.2 U139.18
4I30: U118.2 U139.17
4I31: U110.2 U139.16
4I32: U197.2 U210.9
4I33: U205.2 U210.8
4I34: U196.2 U210.7
4I35: U204.2 U210.6
4I36: U195.2 U210.5
4I37: U203.2 U210.4
4I38: U194.2 U210.3
4I39: U202.2 U210.2
4I40: U186.2 U210.23
4I41: U178.2 U210.22
4I42: U187.2 U210.21
4I43: U179.2 U210.20
4I44: U188.2 U210.19
4I45: U180.2 U210.18
4I46: U189.2 U210.17
4I47: U181.2 U210.16
4I48: U268.2 U281.9
4I49: U276.2 U281.8
4I50: U267.2 U281.7
4I51: U275.2 U281.6
4I52: U266.2 U281.5
4I53: U274.2 U281.4
4I54: U265.2 U281.3
4I55: U273.2 U281.2
4I56: U257.2 U281.23
4I57: U249.2 U281.22
4I58: U258.2 U281.21
4I59: U250.2 U281.20
4I60: U259.2 U281.19
4I61: U251.2 U281.18
4I62: U260.2 U281.17
4I63: U252.2 U281.16
4I64: U339.2 U352.9
4I65: U347.2 U352.8
4I66: U338.2 U352.7
4I67: U346.2 U352.6
4I68: U337.2 U352.5
4I69: U345.2 U352.4
4I70: U336.2 U352.3
4I71: U344.2 U352.2
4I72: U328.2 U352.23
4I73: U320.2 U352.22
4I74: U329.2 U352.21
4I75: U321.2 U352.20
4I76: U330.2 U352.19
4I77: U322.2 U352.18
4I78: U331.2 U352.17
4I79: U323.2 U352.16
4I80: U410.2 U423.9
4I81: U418.2 U423.8
4I82: U409.2 U423.7
4I83: U417.2 U423.6
4I84: U408.2 U423.5
4I85: U416.2 U423.4
4I86: U407.2 U423.3
4I87: U415.2 U423.2
4I88: U399.2 U423.23
4I89: U391.2 U423.22
4I90: U400.2 U423.21
4I91: U392.2 U423.20
4I92: U401.2 U423.19
4I93: U393.2 U423.18
4I94: U402.2 U423.17
4I95: U394.2 U423.16
!CCLR: J1.3 U104.10
!CCLR1: J2.3 U137.10
!CCLR2: J3.3 U208.10
!CCLR3: J4.3 U279.10
!CCLR4: J5.3 U350.10
!CCLR5: J6.3 U421.10
!EN1: U18.15 U105.7
!EN2: U19.15 U105.6
!EN3: U28.15 U105.5
!EN4: U08.15 U105.3
!EN5: U136.3 U139.15
!EN6: U136.7 U140.15
!EN7: U136.6 U141.15
!EN8: U136.5 U142.15
!EN9: U207.3 U210.15
!EN10: U207.7 U211.15
!EN11: U207.6 U212.15
!EN12: U207.5 U213.15
!EN13: U278.3 U281.15
!EN14: U278.7 U282.15
!EN15: U278.6 U283.15
!EN16: U278.5 U284.15
!EN17: U349.3 U352.15
!EN18: U349.7 U353.15
!EN19: U349.6 U354.15
!EN20: U349.5 U355.15
!EN21: U420.3 U423.15
!EN22: U420.7 U424.15
!EN23: U420.6 U425.15
!EN24: U420.5 U426.15
CCLK: J1.2 U104.11 U104.13
CCLK1: J2.2 U137.11 U137.13
CCLK2: J3.2 U208.11 U208.13
CCLK3: J4.2 U279.11 U279.13
CCLK4: J5.2 U350.11 U350.13
CCLK5: J6.2 U421.11 U421.13
CS: J1.4 U106.6
CS1: J2.4 U135.6
CS2: J3.4 U206.6
CS3: J4.4 U277.6
CS4: J5.4 U348.6
CS5: J6.4 U419.6
GND: C1.2 C2.2 C3.2 C4.2 C5.2 C6.2 C7.2 C8.2 C9.2 C10.2 C11.2 J1.8 U01.3 U02.3 U03.3 U04.3 U05.3 U06.3 U07.3 U08.12 U09.3 U10.3 U11.3 U12.3 U13.3 U14.3 U15.3 U16.3 U17.3 U18.12 U19.12 U20.3 U21.3 U22.3 U23.3 U24.3 U25.3 U26.3 U27.3 U28.12 U30.3 U31.3 U32.3 U33.3 U34.3 U35.3 U36.3 U37.3 U40.3 U41.3 U42.3 U43.3 U44.3 U45.3 U46.3 U47.3 U50.3 U51.3 U52.3 U53.3 U54.3 U55.3 U56.3 U57.3 U60.3 U61.3 U62.3 U63.3 U64.3 U65.3 U66.3 U67.3 U70.3 U71.3 U72.3 U73.3 U74.3 U75.3 U76.3 U77.3 U104.8 U104.12 U104.14 U105.4 U106.2
GND1: C12.2 C13.2 C14.2 C15.2 C16.2 C17.2 C18.2 C19.2 C20.2 C21.2 C22.2 J2.8 U29.3 U38.3 U39.3 U48.3 U49.3 U58.3 U59.3 U68.3 U69.3 U78.3 U79.3 U80.3 U81.3 U82.3 U83.3 U84.3 U85.3 U86.3 U87.3 U88.3 U89.3 U90.3 U91.3 U92.3 U93.3 U94.3 U95.3 U96.3 U97.3 U98.3 U99.3 U100.3 U101.3 U102.3 U103.3 U107.3 U108.3 U109.3 U110.3 U111.3 U112.3 U113.3 U114.3 U115.3 U116.3 U117.3 U118.3 U119.3 U120.3 U121.3 U122.3 U123.3 U124.3 U125.3 U126.3 U127.3 U128.3 U129.3 U130.3 U131.3 U132.3 U133.3 U134.3 U135.2 U136.4 U137.8 U137.12 U137.14 U138.3 U139.12 U140.12 U141.12 U142.12
GND2: C23.2 C24.2 C25.2 C26.2 C27.2 C28.2 C29.2 C30.2 C31.2 C32.2 C33.2 J3.8 U143.3 U144.3 U145.3 U146.3 U147.3 U148.3 U149.3 U150.3 U151.3 U152.3 U153.3 U154.3 U155.3 U156.3 U157.3 U158.3 U159.3 U160.3 U161.3 U162.3 U163.3 U164.3 U165.3 U166.3 U167.3 U168.3 U169.3 U170.3 U171.3 U172.3 U173.3 U174.3 U175.3 U176.3 U177.3 U178.3 U179.3 U180.3 U181.3 U182.3 U183.3 U184.3 U185.3 U186.3 U187.3 U188.3 U189.3 U190.3 U191.3 U192.3 U193.3 U194.3 U195.3 U196.3 U197.3 U198.3 U199.3 U200.3 U201.3 U202.3 U203.3 U204.3 U205.3 U206.2 U207.4 U208.8 U208.12 U208.14 U209.3 U210.12 U211.12 U212.12 U213.12
GND3: C34.2 C35.2 C36.2 C37.2 C38.2 C39.2 C40.2 C41.2 C42.2 C43.2 C44.2 J4.8 U214.3 U215.3 U216.3 U217.3 U218.3 U219.3 U220.3 U221.3 U222.3 U223.3 U224.3 U225.3 U226.3 U227.3 U228.3 U229.3 U230.3 U231.3 U232.3 U233.3 U234.3 U235.3 U236.3 U237.3 U238.3 U239.3 U240.3 U241.3 U242.3 U243.3 U244.3 U245.3 U246.3 U247.3 U248.3 U249.3 U250.3 U251.3 U252.3 U253.3 U254.3 U255.3 U256.3 U257.3 U258.3 U259.3 U260.3 U261.3 U262.3 U263.3 U264.3 U265.3 U266.3 U267.3 U268.3 U269.3 U270.3 U271.3 U272.3 U273.3 U274.3 U275.3 U276.3 U277.2 U278.4 U279.8 U279.12 U279.14 U280.3 U281.12 U282.12 U283.12 U284.12
GND4: C45.2 C46.2 C47.2 C48.2 C49.2 C50.2 C51.2 C52.2 C53.2 C54.2 C55.2 J5.8 U285.3 U286.3 U287.3 U288.3 U289.3 U290.3 U291.3 U292.3 U293.3 U294.3 U295.3 U296.3 U297.3 U298.3 U299.3 U300.3 U301.3 U302.3 U303.3 U304.3 U305.3 U306.3 U307.3 U308.3 U309.3 U310.3 U311.3 U312.3 U313.3 U314.3 U315.3 U316.3 U317.3 U318.3 U319.3 U320.3 U321.3 U322.3 U323.3 U324.3 U325.3 U326.3 U327.3 U328.3 U329.3 U330.3 U331.3 U332.3 U333.3 U334.3 U335.3 U336.3 U337.3 U338.3 U339.3 U340.3 U341.3 U342.3 U343.3 U344.3 U345.3 U346.3 U347.3 U348.2 U349.4 U350.8 U350.12 U350.14 U351.3 U352.12 U353.12 U354.12 U355.12
GND5: C56.2 C57.2 C58.2 C59.2 C60.2 C61.2 C62.2 C63.2 C64.2 C65.2 C66.2 J6.8 U356.3 U357.3 U358.3 U359.3 U360.3 U361.3 U362.3 U363.3 U364.3 U365.3 U366.3 U367.3 U368.3 U369.3 U370.3 U371.3 U372.3 U373.3 U374.3 U375.3 U376.3 U377.3 U378.3 U379.3 U380.3 U381.3 U382.3 U383.3 U384.3 U385.3 U386.3 U387.3 U388.3 U389.3 U390.3 U391.3 U392.3 U393.3 U394.3 U395.3 U396.3 U397.3 U398.3 U399.3 U400.3 U401.3 U402.3 U403.3 U404.3 U405.3 U406.3 U407.3 U408.3 U409.3 U410.3 U411.3 U412.3 U413.3 U414.3 U415.3 U416.3 U417.3 U418.3 U419.2 U420.4 U421.8 U421.12 U421.14 U422.3 U423.12 U424.12 U425.12 U426.12
MISO: J1.5 U106.5
MISO1: J2.5 U135.5
MISO2: J3.5 U206.5
MISO3: J4.5 U277.5
MISO4: J5.5 U348.5
MISO5: J6.5 U419.5
N$1: U136.1 U137.4
N$2: U136.2 U137.5
N$3: U207.1 U208.4
N$4: U207.2 U208.5
N$5: U278.1 U279.4
N$6: U278.2 U279.5
N$7: U104.4 U105.1
N$8: U104.5 U105.2
N$9: U349.1 U350.4
N$10: U349.2 U350.5
N$11: U420.1 U421.4
N$12: U420.2 U421.5
OUT: J1.7 U08.1 U18.1 U19.1 U28.1 U106.3
OUT1: J2.7 U135.3 U139.1 U140.1 U141.1 U142.1
OUT2: J3.7 U206.3 U210.1 U211.1 U212.1 U213.1
OUT3: J4.7 U277.3 U281.1 U282.1 U283.1 U284.1
OUT4: J5.7 U348.3 U352.1 U353.1 U354.1 U355.1
OUT5: J6.7 U419.3 U423.1 U424.1 U425.1 U426.1
S0: U08.10 U18.10 U19.10 U28.10 U104.15
S1: U08.11 U18.11 U19.11 U28.11 U104.1
S2: U08.14 U18.14 U19.14 U28.14 U104.2
S3: U08.13 U18.13 U19.13 U28.13 U104.3
S4: U137.15 U139.10 U140.10 U141.10 U142.10
S5: U137.1 U139.11 U140.11 U141.11 U142.11
S6: U137.2 U139.14 U140.14 U141.14 U142.14
S7: U137.3 U139.13 U140.13 U141.13 U142.13
S8: U208.15 U210.10 U211.10 U212.10 U213.10
S9: U208.1 U210.11 U211.11 U212.11 U213.11
S10: U208.2 U210.14 U211.14 U212.14 U213.14
S11: U208.3 U210.13 U211.13 U212.13 U213.13
S12: U279.15 U281.10 U282.10 U283.10 U284.10
S13: U279.1 U281.11 U282.11 U283.11 U284.11
S14: U279.2 U281.14 U282.14 U283.14 U284.14
S15: U279.3 U281.13 U282.13 U283.13 U284.13
S16: U350.15 U352.10 U353.10 U354.10 U355.10
S17: U350.1 U352.11 U353.11 U354.11 U355.11
S18: U350.2 U352.14 U353.14 U354.14 U355.14
S19: U350.3 U352.13 U353.13 U354.13 U355.13
S20: U421.15 U423.10 U424.10 U425.10 U426.10
S21: U421.1 U423.11 U424.11 U425.11 U426.11
S22: U421.2 U423.14 U424.14 U425.14 U426.14
S23: U421.3 U423.13 U424.13 U425.13 U426.13
SCLK: J1.6 U106.4
SCLK1: J2.6 U135.4
SCLK2: J3.6 U206.4
SCLK3: J4.6 U277.4
SCLK4: J5.6 U348.4
SCLK5: J6.6 U419.4

## Tracks (layer width: path | path; a pad name or v marks a point on that pad's centre or on a via)
1I0  (via drill 0.3)
  Top 0.152: U32.2 27.62,18.1 27.43,18.29 v27.43,19.05
  Bottom 0.152: U18.9 28.86,25.05 27.43,23.62 v27.43,19.05
1I1  (via drill 0.3)
  Top 0.152: U33.2 32.83,18.1 33.02,18.29 v33.02,19.05
  Bottom 0.152: U18.8 31.45,25.7 31.75,25.4 31.75,20.32 v33.02,19.05
1I2  (via drill 0.3)
  Top 0.152: U22.2 26.99,21.91 v26.67,21.59
  Bottom 0.152: U18.7 28.89,26.34 26.67,24.13 v26.67,21.59
1I3  (via drill 0.3)
  Top 0.152: U23.2 32.7,21.91 v33.02,21.59
  Bottom 0.152: U18.6 31.43,27 32.38,26.04 32.38,24.77 33.02,24.13 v33.02,21.59
1I4  (via drill 0.3)
  Top 0.152: U12.2 26.99,25.72 v26.67,25.4
  Bottom 0.152: U18.5 27.64,27.64 26.67,26.67 v26.67,25.4
1I5  (via drill 0.3)
  Top 0.152: U13.2 32.7,25.72 v33.02,25.4
  Bottom 0.152: U18.4 32.66,28.3 33.02,27.94 v33.02,25.4
1I6  (via drill 0.3)
  Top 0.152: U02.2 26.99,29.53 v26.67,29.21
  Bottom 0.152: U18.3 26.93,28.95 v26.67,29.21
1I7  (via drill 0.3)
  Top 0.152: U03.2 32.7,29.53 v33.02,29.21
  Bottom 0.152: U18.2 32.63,29.59 v33.02,29.21
1I8  (via drill 0.3)
  Top 0.152: U01.2 25.08,29.53 v25.4,29.21
  Bottom 0.152: U18.23 25.02,29.59 v25.4,29.21
1I9  (via drill 0.3)
  Top 0.152: U09.2 21.27,29.53 v21.59,29.21
  Bottom 0.152: U18.22 21.86,28.95 v21.59,29.21
1I10  (via drill 0.3)
  Top 0.152: U11.2 25.08,25.72 v25.4,25.4
  Bottom 0.152: U18.21 25.05,28.3 25.4,27.94 v25.4,25.4
1I11  (via drill 0.3)
  Top 0.152: U10.2 20.59,26.4 v20.32,26.67
  Bottom 0.152: U18.20 21.3,27.64 v20.32,26.67
1I12  (via drill 0.3)
  Top 0.152: U21.2 25.08,21.91 v25.4,21.59
  Bottom 0.152: U18.19 24.57,27 24.77,26.8 24.77,24.77 25.4,24.13 25.53,24.13 26.16,23.5 26.16,22.35 v25.4,21.59
1I13  (via drill 0.3)
  Top 0.152: U20.2 19.87,21.91 19.56,22.23 v19.56,22.86
  Bottom 0.152: U18.18 21.27,26.34 19.56,24.64 v19.56,22.86
1I14  (via drill 0.3)
  Top 0.152: U31.2 24.4,19.03 v24.38,19.05
  Bottom 0.152: U18.17 23.84,25.7 24.13,25.4 24.13,19.3 v24.38,19.05
1I15  (via drill 0.3)
  Top 0.152: U30.2 20.59,18.78 v20.32,19.05
  Bottom 0.152: U18.16 21.23,25.05 20.32,24.13 v20.32,19.05
1I16  (via drill 0.3)
  Top 0.152: U87.2 80.2,18.1 80.01,18.29 v80.01,19.05
  Bottom 0.152: U140.9 81.43,25.05 80.01,23.62 v80.01,19.05
1I17  (via drill 0.3)
  Top 0.152: U95.2 85.41,18.1 85.6,18.29 v85.6,19.05
  Bottom 0.152: U140.8 84.03,25.7 84.33,25.4 84.33,20.32 v85.6,19.05
1I18  (via drill 0.3)
  Top 0.152: U86.2 79.57,21.91 v79.25,21.59
  Bottom 0.152: U140.7 81.46,26.34 79.25,24.13 v79.25,21.59
1I19  (via drill 0.3)